# EAGLE board IO4-IR-Detector-Active-Mount_array (EAGLE 7.7.0)
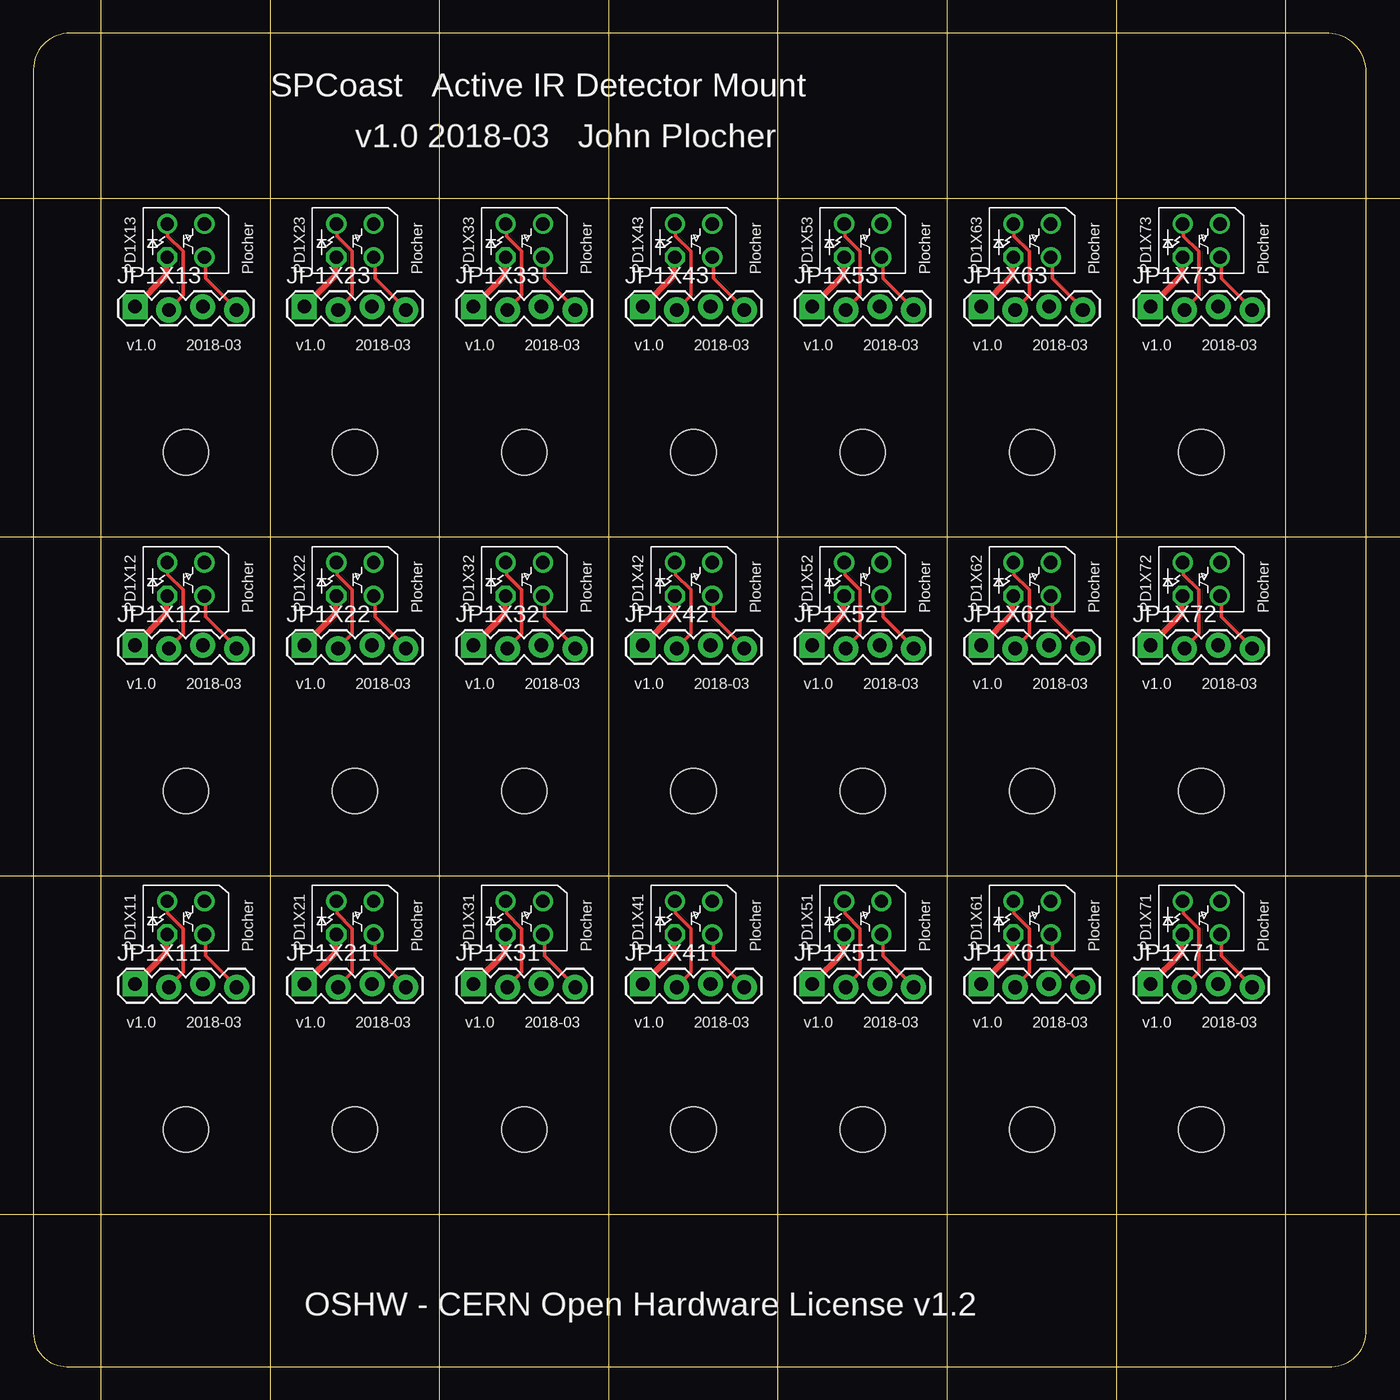
[diagram p0: board, top side]
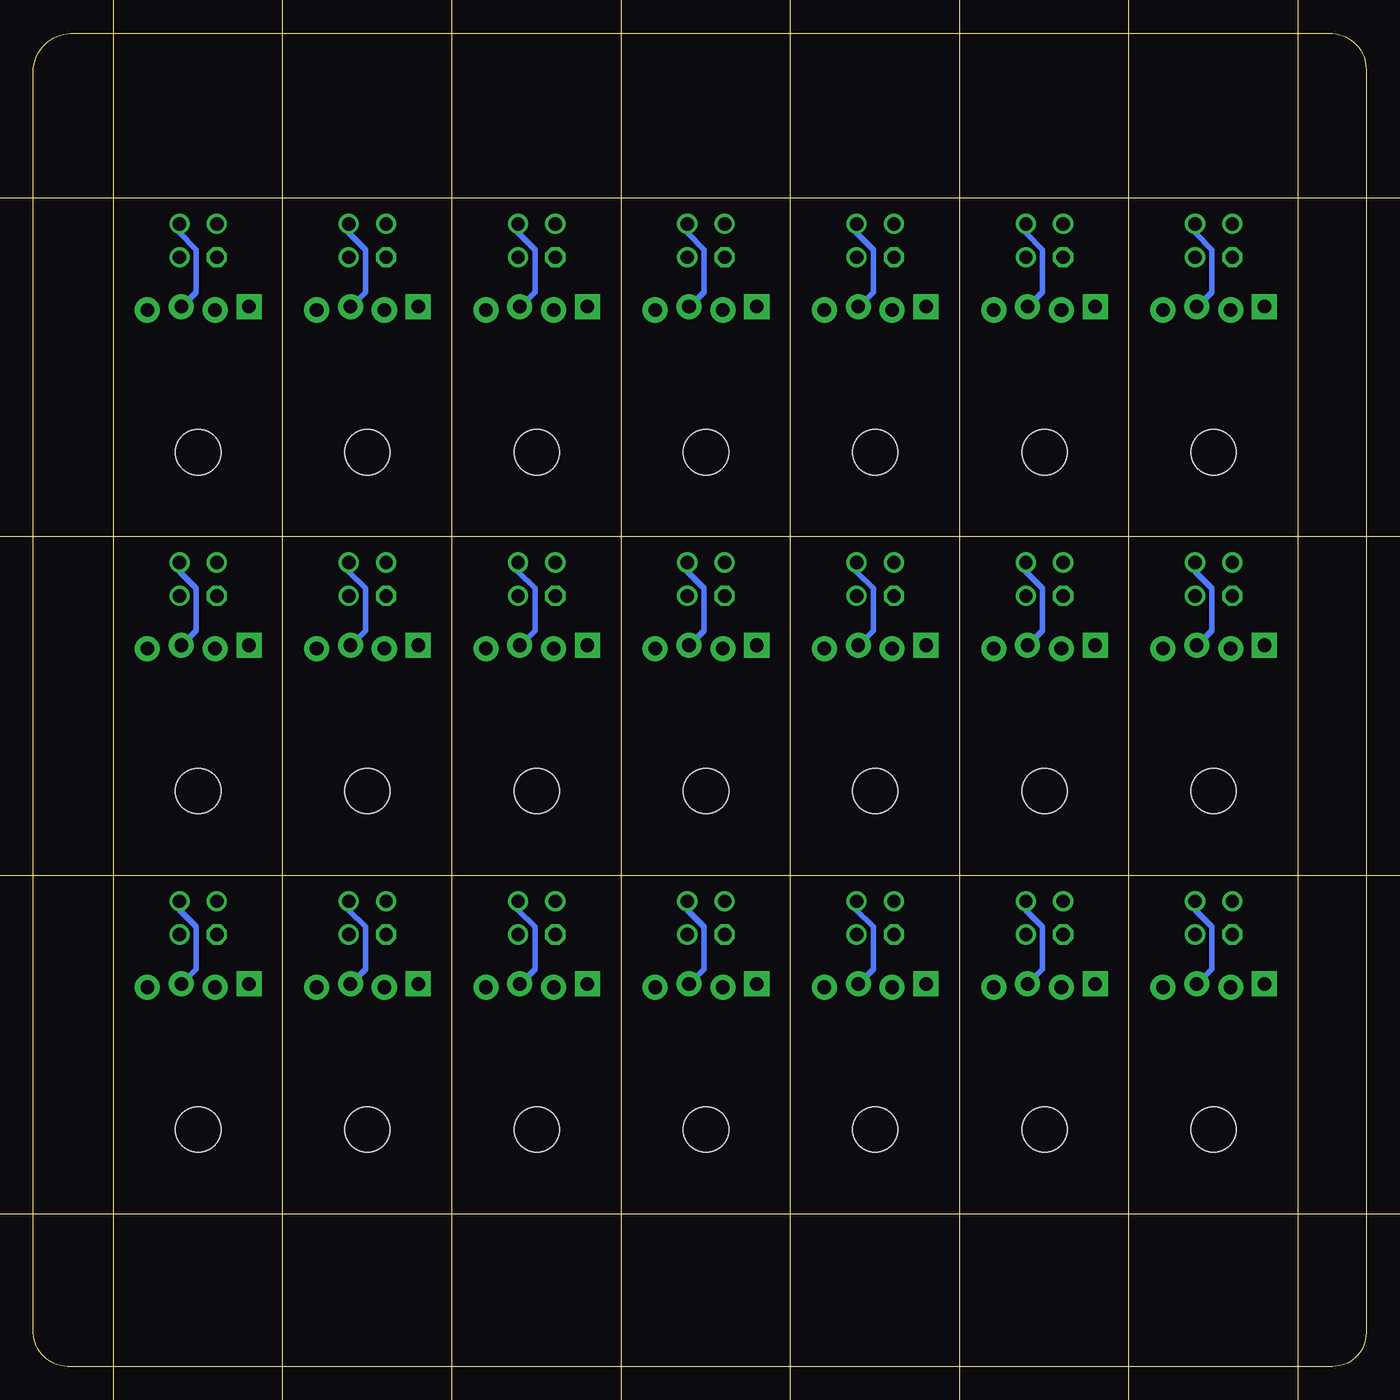
[diagram p1: board, bottom side, seen from below]

Size 100.01 x 100 mm. Coordinates in mm from the lower left corner, seen from the top.
Copper layers (1*16): Top 0.035mm / dielectric 1.5mm / Bottom 0.035mm
Design rules "default": minimum track width 10mil, minimum drill 0.6mm, track to track 8mil, track to pad 8mil, pad to pad 8mil, via to via 8mil, smd to smd 8mil, copper to edge 40mil, drill to drill 8mil, minimum pad ring 10mil, minimum via ring 8mil, stop-mask expansion 4mil, vias tented up to drill 0mil, thermal gap 10mil
Holes 3.4 mm at 11.44,17.78 11.44,43.18 11.44,68.58 24.14,17.78 24.14,43.18 24.14,68.58 36.84,17.78 36.84,43.18 36.84,68.58 49.54,17.78 49.54,43.18 49.54,68.58 62.24,17.78 62.24,43.18 62.24,68.58 74.94,17.78 74.94,43.18 74.94,68.58 87.64,17.78 87.64,43.18 87.64,68.58
Milling: 12 lines

## Footprints (pad centres in the part's own frame; a part is rotated, then mirrored left to right if it is on the bottom)
1X04_LOCK = drill 1.016 pad 1.88 square: 1 0,0.127 | drill 1.016 pad 1.88: 2 2.54,-0.127; 3 5.08,0.127; 4 7.62,-0.127
RPR220 = drill 1 octagon: A -1.4,-1.25 | drill 1: COL 1.4,-1.25; EMIT 1.4,1.25; K -1.4,1.25

## Placement (x,y rotation side)
JP1X11  0.100  [1X04_LOCK]  7.63,28.58 0 top
JP1X12  0.100  [1X04_LOCK]  7.63,53.98 0 top
JP1X13  0.100  [1X04_LOCK]  7.63,79.38 0 top
JP1X21  0.100  [1X04_LOCK]  20.33,28.58 0 top
JP1X22  0.100  [1X04_LOCK]  20.33,53.98 0 top
JP1X23  0.100  [1X04_LOCK]  20.33,79.38 0 top
JP1X31  0.100  [1X04_LOCK]  33.03,28.58 0 top
JP1X32  0.100  [1X04_LOCK]  33.03,53.98 0 top
JP1X33  0.100  [1X04_LOCK]  33.03,79.38 0 top
JP1X41  0.100  [1X04_LOCK]  45.73,28.58 0 top
JP1X42  0.100  [1X04_LOCK]  45.73,53.98 0 top
JP1X43  0.100  [1X04_LOCK]  45.73,79.38 0 top
JP1X51  0.100  [1X04_LOCK]  58.43,28.58 0 top
JP1X52  0.100  [1X04_LOCK]  58.43,53.98 0 top
JP1X53  0.100  [1X04_LOCK]  58.43,79.38 0 top
JP1X61  0.100  [1X04_LOCK]  71.13,28.58 0 top
JP1X62  0.100  [1X04_LOCK]  71.13,53.98 0 top
JP1X63  0.100  [1X04_LOCK]  71.13,79.38 0 top
JP1X71  0.100  [1X04_LOCK]  83.83,28.58 0 top
JP1X72  0.100  [1X04_LOCK]  83.83,53.98 0 top
JP1X73  0.100  [1X04_LOCK]  83.83,79.38 0 top
PD1X1  BOARD  [BOARD-SEEED10X10-NOHOLES]  0.01,0 0 top
PD1X11  RPR220  [RPR220]  11.44,33.66 0 top
PD1X12  RPR220  [RPR220]  11.44,59.06 0 top
PD1X13  RPR220  [RPR220]  11.44,84.46 0 top
PD1X21  RPR220  [RPR220]  24.14,33.66 0 top
PD1X22  RPR220  [RPR220]  24.14,59.06 0 top
PD1X23  RPR220  [RPR220]  24.14,84.46 0 top
PD1X31  RPR220  [RPR220]  36.84,33.66 0 top
PD1X32  RPR220  [RPR220]  36.84,59.06 0 top
PD1X33  RPR220  [RPR220]  36.84,84.46 0 top
PD1X41  RPR220  [RPR220]  49.54,33.66 0 top
PD1X42  RPR220  [RPR220]  49.54,59.06 0 top
PD1X43  RPR220  [RPR220]  49.54,84.46 0 top
PD1X51  RPR220  [RPR220]  62.24,33.66 0 top
PD1X52  RPR220  [RPR220]  62.24,59.06 0 top
PD1X53  RPR220  [RPR220]  62.24,84.46 0 top
PD1X61  RPR220  [RPR220]  74.94,33.66 0 top
PD1X62  RPR220  [RPR220]  74.94,59.06 0 top
PD1X63  RPR220  [RPR220]  74.94,84.46 0 top
PD1X71  RPR220  [RPR220]  87.64,33.66 0 top
PD1X72  RPR220  [RPR220]  87.64,59.06 0 top
PD1X73  RPR220  [RPR220]  87.64,84.46 0 top

## Library data of the parts
JP1X11-JP1X13 JP1X21-JP1X23 JP1X31-JP1X33 JP1X41-JP1X43 JP1X51-JP1X53 JP1X61-JP1X63 JP1X71-JP1X73 PD1X1 PD1X11-PD1X13 PD1X21-PD1X23 PD1X31-PD1X33 PD1X41-PD1X43 PD1X51-PD1X53 PD1X61-PD1X63 PD1X71-PD1X73 = SPCoast

## Nets
N$1X11: JP1X11.2 PD1X11.K
N$1X12: JP1X12.2 PD1X12.K
N$1X13: JP1X13.2 PD1X13.K
N$1X21: JP1X21.2 PD1X21.K
N$1X22: JP1X22.2 PD1X22.K
N$1X23: JP1X23.2 PD1X23.K
N$1X31: JP1X31.2 PD1X31.K
N$1X32: JP1X32.2 PD1X32.K
N$1X33: JP1X33.2 PD1X33.K
N$1X41: JP1X41.2 PD1X41.K
N$1X42: JP1X42.2 PD1X42.K
N$1X43: JP1X43.2 PD1X43.K
N$1X51: JP1X51.2 PD1X51.K
N$1X52: JP1X52.2 PD1X52.K
N$1X53: JP1X53.2 PD1X53.K
N$1X61: JP1X61.2 PD1X61.K
N$1X62: JP1X62.2 PD1X62.K
N$1X63: JP1X63.2 PD1X63.K
N$1X71: JP1X71.2 PD1X71.K
N$1X72: JP1X72.2 PD1X72.K
N$1X73: JP1X73.2 PD1X73.K
N$2X11: JP1X11.1 PD1X11.A
N$2X12: JP1X12.1 PD1X12.A
N$2X13: JP1X13.1 PD1X13.A
N$2X21: JP1X21.1 PD1X21.A
N$2X22: JP1X22.1 PD1X22.A
N$2X23: JP1X23.1 PD1X23.A
N$2X31: JP1X31.1 PD1X31.A
N$2X32: JP1X32.1 PD1X32.A
N$2X33: JP1X33.1 PD1X33.A
N$2X41: JP1X41.1 PD1X41.A
N$2X42: JP1X42.1 PD1X42.A
N$2X43: JP1X43.1 PD1X43.A
N$2X51: JP1X51.1 PD1X51.A
N$2X52: JP1X52.1 PD1X52.A
N$2X53: JP1X53.1 PD1X53.A
N$2X61: JP1X61.1 PD1X61.A
N$2X62: JP1X62.1 PD1X62.A
N$2X63: JP1X63.1 PD1X63.A
N$2X71: JP1X71.1 PD1X71.A
N$2X72: JP1X72.1 PD1X72.A
N$2X73: JP1X73.1 PD1X73.A
N$3X11: JP1X11.4 PD1X11.COL
N$3X12: JP1X12.4 PD1X12.COL
N$3X13: JP1X13.4 PD1X13.COL
N$3X21: JP1X21.4 PD1X21.COL
N$3X22: JP1X22.4 PD1X22.COL
N$3X23: JP1X23.4 PD1X23.COL
N$3X31: JP1X31.4 PD1X31.COL
N$3X32: JP1X32.4 PD1X32.COL
N$3X33: JP1X33.4 PD1X33.COL
N$3X41: JP1X41.4 PD1X41.COL
N$3X42: JP1X42.4 PD1X42.COL
N$3X43: JP1X43.4 PD1X43.COL
N$3X51: JP1X51.4 PD1X51.COL
N$3X52: JP1X52.4 PD1X52.COL
N$3X53: JP1X53.4 PD1X53.COL
N$3X61: JP1X61.4 PD1X61.COL
N$3X62: JP1X62.4 PD1X62.COL
N$3X63: JP1X63.4 PD1X63.COL
N$3X71: JP1X71.4 PD1X71.COL
N$3X72: JP1X72.4 PD1X72.COL
N$3X73: JP1X73.4 PD1X73.COL
N$4X11: JP1X11.3 PD1X11.EMIT
N$4X12: JP1X12.3 PD1X12.EMIT
N$4X13: JP1X13.3 PD1X13.EMIT
N$4X21: JP1X21.3 PD1X21.EMIT
N$4X22: JP1X22.3 PD1X22.EMIT
N$4X23: JP1X23.3 PD1X23.EMIT
N$4X31: JP1X31.3 PD1X31.EMIT
N$4X32: JP1X32.3 PD1X32.EMIT
N$4X33: JP1X33.3 PD1X33.EMIT
N$4X41: JP1X41.3 PD1X41.EMIT
N$4X42: JP1X42.3 PD1X42.EMIT
N$4X43: JP1X43.3 PD1X43.EMIT
N$4X51: JP1X51.3 PD1X51.EMIT
N$4X52: JP1X52.3 PD1X52.EMIT
N$4X53: JP1X53.3 PD1X53.EMIT
N$4X61: JP1X61.3 PD1X61.EMIT
N$4X62: JP1X62.3 PD1X62.EMIT
N$4X63: JP1X63.3 PD1X63.EMIT
N$4X71: JP1X71.3 PD1X71.EMIT
N$4X72: JP1X72.3 PD1X72.EMIT
N$4X73: JP1X73.3 PD1X73.EMIT

## Tracks (layer width: path | path; a pad name or v marks a point on that pad's centre or on a via)
N$1X11
  Top 0.254: PD1X11.K 10.09,34.8 10.09,34 11.24,32.86 11.24,29.57 10.21,28.54 JP1X11.2
N$1X12
  Top 0.254: PD1X12.K 10.09,60.2 10.09,59.4 11.24,58.26 11.24,54.97 10.21,53.94 JP1X12.2
N$1X13
  Top 0.254: PD1X13.K 10.09,85.6 10.09,84.8 11.24,83.66 11.24,80.37 10.21,79.34 JP1X13.2
N$1X21
  Top 0.254: PD1X21.K 22.79,34.8 22.79,34 23.94,32.86 23.94,29.57 22.91,28.54 JP1X21.2
N$1X22
  Top 0.254: PD1X22.K 22.79,60.2 22.79,59.4 23.94,58.26 23.94,54.97 22.91,53.94 JP1X22.2
N$1X23
  Top 0.254: PD1X23.K 22.79,85.6 22.79,84.8 23.94,83.66 23.94,80.37 22.91,79.34 JP1X23.2
N$1X31
  Top 0.254: PD1X31.K 35.49,34.8 35.49,34 36.64,32.86 36.64,29.57 35.61,28.54 JP1X31.2
N$1X32
  Top 0.254: PD1X32.K 35.49,60.2 35.49,59.4 36.64,58.26 36.64,54.97 35.61,53.94 JP1X32.2
N$1X33
  Top 0.254: PD1X33.K 35.49,85.6 35.49,84.8 36.64,83.66 36.64,80.37 35.61,79.34 JP1X33.2
N$1X41
  Top 0.254: PD1X41.K 48.19,34.8 48.19,34 49.34,32.86 49.34,29.57 48.31,28.54 JP1X41.2
N$1X42
  Top 0.254: PD1X42.K 48.19,60.2 48.19,59.4 49.34,58.26 49.34,54.97 48.31,53.94 JP1X42.2
N$1X43
  Top 0.254: PD1X43.K 48.19,85.6 48.19,84.8 49.34,83.66 49.34,80.37 48.31,79.34 JP1X43.2
N$1X51
  Top 0.254: PD1X51.K 60.89,34.8 60.89,34 62.04,32.86 62.04,29.57 61.01,28.54 JP1X51.2
N$1X52
  Top 0.254: PD1X52.K 60.89,60.2 60.89,59.4 62.04,58.26 62.04,54.97 61.01,53.94 JP1X52.2
N$1X53
  Top 0.254: PD1X53.K 60.89,85.6 60.89,84.8 62.04,83.66 62.04,80.37 61.01,79.34 JP1X53.2
N$1X61
  Top 0.254: PD1X61.K 73.59,34.8 73.59,34 74.74,32.86 74.74,29.57 73.71,28.54 JP1X61.2
N$1X62
  Top 0.254: PD1X62.K 73.59,60.2 73.59,59.4 74.74,58.26 74.74,54.97 73.71,53.94 JP1X62.2
N$1X63
  Top 0.254: PD1X63.K 73.59,85.6 73.59,84.8 74.74,83.66 74.74,80.37 73.71,79.34 JP1X63.2
N$1X71
  Top 0.254: PD1X71.K 86.29,34.8 86.29,34 87.44,32.86 87.44,29.57 86.41,28.54 JP1X71.2
N$1X72
  Top 0.254: PD1X72.K 86.29,60.2 86.29,59.4 87.44,58.26 87.44,54.97 86.41,53.94 JP1X72.2
N$1X73
  Top 0.254: PD1X73.K 86.29,85.6 86.29,84.8 87.44,83.66 87.44,80.37 86.41,79.34 JP1X73.2
N$2X11
  Top 0.406: JP1X11.1 9.98,31.06 9.98,32.4 PD1X11.A
N$2X12
  Top 0.406: JP1X12.1 9.98,56.46 9.98,57.8 PD1X12.A
N$2X13
  Top 0.406: JP1X13.1 9.98,81.86 9.98,83.2 PD1X13.A
N$2X21
  Top 0.406: JP1X21.1 22.68,31.06 22.68,32.4 PD1X21.A
N$2X22
  Top 0.406: JP1X22.1 22.68,56.46 22.68,57.8 PD1X22.A
N$2X23
  Top 0.406: JP1X23.1 22.68,81.86 22.68,83.2 PD1X23.A
N$2X31
  Top 0.406: JP1X31.1 35.38,31.06 35.38,32.4 PD1X31.A
N$2X32
  Top 0.406: JP1X32.1 35.38,56.46 35.38,57.8 PD1X32.A
N$2X33
  Top 0.406: JP1X33.1 35.38,81.86 35.38,83.2 PD1X33.A
N$2X41
  Top 0.406: JP1X41.1 48.08,31.06 48.08,32.4 PD1X41.A
N$2X42
  Top 0.406: JP1X42.1 48.08,56.46 48.08,57.8 PD1X42.A
N$2X43
  Top 0.406: JP1X43.1 48.08,81.86 48.08,83.2 PD1X43.A
N$2X51
  Top 0.406: JP1X51.1 60.78,31.06 60.78,32.4 PD1X51.A
N$2X52
  Top 0.406: JP1X52.1 60.78,56.46 60.78,57.8 PD1X52.A
N$2X53
  Top 0.406: JP1X53.1 60.78,81.86 60.78,83.2 PD1X53.A
N$2X61
  Top 0.406: JP1X61.1 73.48,31.06 73.48,32.4 PD1X61.A
N$2X62
  Top 0.406: JP1X62.1 73.48,56.46 73.48,57.8 PD1X62.A
N$2X63
  Top 0.406: JP1X63.1 73.48,81.86 73.48,83.2 PD1X63.A
N$2X71
  Top 0.406: JP1X71.1 86.18,31.06 86.18,32.4 PD1X71.A
N$2X72
  Top 0.406: JP1X72.1 86.18,56.46 86.18,57.8 PD1X72.A
N$2X73
  Top 0.406: JP1X73.1 86.18,81.86 86.18,83.2 PD1X73.A
N$3X11
  Top 0.254: PD1X11.COL 12.95,32.4 12.95,30.83 15.24,28.54 JP1X11.4
N$3X12
  Top 0.254: PD1X12.COL 12.95,57.8 12.95,56.23 15.24,53.94 JP1X12.4
N$3X13
  Top 0.254: PD1X13.COL 12.95,83.2 12.95,81.63 15.24,79.34 JP1X13.4
N$3X21
  Top 0.254: PD1X21.COL 25.65,32.4 25.65,30.83 27.94,28.54 JP1X21.4
N$3X22
  Top 0.254: PD1X22.COL 25.65,57.8 25.65,56.23 27.94,53.94 JP1X22.4
N$3X23
  Top 0.254: PD1X23.COL 25.65,83.2 25.65,81.63 27.94,79.34 JP1X23.4
N$3X31
  Top 0.254: PD1X31.COL 38.35,32.4 38.35,30.83 40.64,28.54 JP1X31.4
N$3X32
  Top 0.254: PD1X32.COL 38.35,57.8 38.35,56.23 40.64,53.94 JP1X32.4
N$3X33
  Top 0.254: PD1X33.COL 38.35,83.2 38.35,81.63 40.64,79.34 JP1X33.4
N$3X41
  Top 0.254: PD1X41.COL 51.05,32.4 51.05,30.83 53.34,28.54 JP1X41.4
N$3X42
  Top 0.254: PD1X42.COL 51.05,57.8 51.05,56.23 53.34,53.94 JP1X42.4
N$3X43
  Top 0.254: PD1X43.COL 51.05,83.2 51.05,81.63 53.34,79.34 JP1X43.4
N$3X51
  Top 0.254: PD1X51.COL 63.75,32.4 63.75,30.83 66.04,28.54 JP1X51.4
N$3X52
  Top 0.254: PD1X52.COL 63.75,57.8 63.75,56.23 66.04,53.94 JP1X52.4
N$3X53
  Top 0.254: PD1X53.COL 63.75,83.2 63.75,81.63 66.04,79.34 JP1X53.4
N$3X61
  Top 0.254: PD1X61.COL 76.45,32.4 76.45,30.83 78.74,28.54 JP1X61.4
N$3X62
  Top 0.254: PD1X62.COL 76.45,57.8 76.45,56.23 78.74,53.94 JP1X62.4
N$3X63
  Top 0.254: PD1X63.COL 76.45,83.2 76.45,81.63 78.74,79.34 JP1X63.4
N$3X71
  Top 0.254: PD1X71.COL 89.15,32.4 89.15,30.83 91.44,28.54 JP1X71.4
N$3X72
  Top 0.254: PD1X72.COL 89.15,57.8 89.15,56.23 91.44,53.94 JP1X72.4
N$3X73
  Top 0.254: PD1X73.COL 89.15,83.2 89.15,81.63 91.44,79.34 JP1X73.4
N$4X11
  Bottom 0.406: PD1X11.EMIT 12.84,34.8 12.84,34.23 11.58,32.97 11.58,29.8 12.61,28.77 JP1X11.3
N$4X12
  Bottom 0.406: PD1X12.EMIT 12.84,60.2 12.84,59.63 11.58,58.37 11.58,55.2 12.61,54.17 JP1X12.3
N$4X13
  Bottom 0.406: PD1X13.EMIT 12.84,85.6 12.84,85.03 11.58,83.77 11.58,80.6 12.61,79.57 JP1X13.3
N$4X21
  Bottom 0.406: PD1X21.EMIT 25.54,34.8 25.54,34.23 24.28,32.97 24.28,29.8 25.31,28.77 JP1X21.3
N$4X22
  Bottom 0.406: PD1X22.EMIT 25.54,60.2 25.54,59.63 24.28,58.37 24.28,55.2 25.31,54.17 JP1X22.3
N$4X23
  Bottom 0.406: PD1X23.EMIT 25.54,85.6 25.54,85.03 24.28,83.77 24.28,80.6 25.31,79.57 JP1X23.3
N$4X31
  Bottom 0.406: PD1X31.EMIT 38.24,34.8 38.24,34.23 36.98,32.97 36.98,29.8 38.01,28.77 JP1X31.3
N$4X32
  Bottom 0.406: PD1X32.EMIT 38.24,60.2 38.24,59.63 36.98,58.37 36.98,55.2 38.01,54.17 JP1X32.3
N$4X33
  Bottom 0.406: PD1X33.EMIT 38.24,85.6 38.24,85.03 36.98,83.77 36.98,80.6 38.01,79.57 JP1X33.3
N$4X41
  Bottom 0.406: PD1X41.EMIT 50.94,34.8 50.94,34.23 49.68,32.97 49.68,29.8 50.71,28.77 JP1X41.3
N$4X42
  Bottom 0.406: PD1X42.EMIT 50.94,60.2 50.94,59.63 49.68,58.37 49.68,55.2 50.71,54.17 JP1X42.3
N$4X43
  Bottom 0.406: PD1X43.EMIT 50.94,85.6 50.94,85.03 49.68,83.77 49.68,80.6 50.71,79.57 JP1X43.3
N$4X51
  Bottom 0.406: PD1X51.EMIT 63.64,34.8 63.64,34.23 62.38,32.97 62.38,29.8 63.41,28.77 JP1X51.3
N$4X52
  Bottom 0.406: PD1X52.EMIT 63.64,60.2 63.64,59.63 62.38,58.37 62.38,55.2 63.41,54.17 JP1X52.3
N$4X53
  Bottom 0.406: PD1X53.EMIT 63.64,85.6 63.64,85.03 62.38,83.77 62.38,80.6 63.41,79.57 JP1X53.3
N$4X61
  Bottom 0.406: PD1X61.EMIT 76.34,34.8 76.34,34.23 75.08,32.97 75.08,29.8 76.11,28.77 JP1X61.3
N$4X62
  Bottom 0.406: PD1X62.EMIT 76.34,60.2 76.34,59.63 75.08,58.37 75.08,55.2 76.11,54.17 JP1X62.3
N$4X63
  Bottom 0.406: PD1X63.EMIT 76.34,85.6 76.34,85.03 75.08,83.77 75.08,80.6 76.11,79.57 JP1X63.3
N$4X71
  Bottom 0.406: PD1X71.EMIT 89.04,34.8 89.04,34.23 87.78,32.97 87.78,29.8 88.81,28.77 JP1X71.3
N$4X72
  Bottom 0.406: PD1X72.EMIT 89.04,60.2 89.04,59.63 87.78,58.37 87.78,55.2 88.81,54.17 JP1X72.3
N$4X73
  Bottom 0.406: PD1X73.EMIT 89.04,85.6 89.04,85.03 87.78,83.77 87.78,80.6 88.81,79.57 JP1X73.3

## Text on the board
tPlace: SPCoast Active IR Detector Mount | v1.0 2018-03 John Plocher | Plocher | Plocher | Plocher | Plocher | Plocher | Plocher | Plocher | v1.0 | 2018-03 | v1.0 | 2018-03 | v1.0 | 2018-03 | v1.0 | 2018-03 | v1.0 | 2018-03 | v1.0 | 2018-03 | v1.0 | 2018-03 | Plocher | Plocher | Plocher | Plocher | Plocher | Plocher | Plocher | v1.0 | 2018-03 | v1.0 | 2018-03 | v1.0 | 2018-03 | v1.0 | 2018-03 | v1.0 | 2018-03 | v1.0 | 2018-03 | v1.0 | 2018-03 | Plocher | Plocher | Plocher | Plocher | Plocher | Plocher | Plocher | v1.0 | 2018-03 | v1.0 | 2018-03 | v1.0 | 2018-03 | v1.0 | 2018-03 | v1.0 | 2018-03 | v1.0 | 2018-03 | v1.0 | 2018-03 | OSHW - CERN Open Hardware License v1.2
Milling: V-Score | V-Score | V-Score | V-Score | V-Score | V-Score | V-Score | V-Score | V-Score | V-Score | V-Score | V-Score